# EAGLE board extruderControllerv1 (EAGLE 9.2.2)

Size 117.78 x 68.57 mm. Coordinates in mm from the lower left corner, seen from the top.
Outline: 0,0 117.78,0 117.78,68.57 0,68.57 0,0
Copper layers (1*16): Top 0.035mm / dielectric 1.5mm / Bottom 0.035mm
Design rules "default": minimum track width 6mil, minimum drill 0.35mm, track to track 6mil, track to pad 6mil, pad to pad 6mil, via to via 6mil, smd to smd 6mil, copper to edge 40mil, drill to drill 6mil, minimum pad ring 10mil, minimum via ring 8mil, stop-mask expansion 4mil, vias tented up to drill 0mil, thermal gap 10mil

## Footprints (pad centres in the part's own frame; a part is rotated, then mirrored left to right if it is on the bottom)
PANASONIC_D = smd 3 x 1.4: + 2.4,0; - -2.4,0
C0603 = smd 1.1 x 1: 1 -0.85,0; 2 0.85,0
SMB = smd 2.4 x 2.4: A 2.2,0; C -2.2,0
3,3-PAD = drill 3.3 pad 5.842: B3,3 0,0
SOT223 = smd 1.219 x 2.235: 1 -2.311,-3.099; 2 0,-3.099; 3 2.311,-3.099 | smd 3.6 x 2.2: TAB 0,3.099
SO08 = smd 0.66 x 2.032: 1 -1.905,-3.073; 2 -0.635,-3.073; 3 0.635,-3.073; 4 1.905,-3.073; 5 1.905,3.073; 6 0.635,3.073; 7 -0.635,3.073; 8 -1.905,3.073
SO16 = smd 0.66 x 2.032: 1 -4.445,-3.073; 2 -3.175,-3.073; 3 -1.905,-3.073; 4 -0.635,-3.073; 5 0.635,-3.073; 6 1.905,-3.073; 7 3.175,-3.073; 8 4.445,-3.073; 9 4.445,3.073; 10 3.175,3.073; 11 1.905,3.073; 12 0.635,3.073; 13 -0.635,3.073; 14 -1.905,3.073; 15 -3.175,3.073; 16 -4.445,3.073
QS = drill 0.61 long: 1 -2.54,0; 2 2.54,0
SOT669 = smd 0.7 x 1.4: 1 -1.905,-2.65; 2 -0.635,-2.65; 3 0.635,-2.65; 4 1.905,-2.65 | smd 5 x 4.3: MB 0,1
R0805 = smd 1.3 x 1.5: 1 -0.95,0; 2 0.95,0
R1210 = smd 1.6 x 2.7: 1 -1.4,0; 2 1.4,0
MA03-2 = drill 1.016: 1 -2.54,-1.27 | drill 1.016 octagon: 2 -2.54,1.27; 3 0,-1.27; 4 0,1.27; 5 2.54,-1.27; 6 2.54,1.27
TQFP100 = smd 1.5 x 0.3: 1 -8,6; 2 -8,5.5; 3 -8,5; 4 -8,4.5; 5 -8,4; 6 -8,3.5; 7 -8,3; 8 -8,2.5; 9 -8,2; 10 -8,1.5; 11 -8,1; 12 -8,0.5; 13 -8,0; 14 -8,-0.5; 15 -8,-1; 16 -8,-1.5; 17 -8,-2; 18 -8,-2.5; 19 -8,-3; 20 -8,-3.5; 21 -8,-4; 22 -8,-4.5; 23 -8,-5; 24 -8,-5.5; 25 -8,-6; 51 8,-6; 52 8,-5.5; 53 8,-5; 54 8,-4.5; 55 8,-4; 56 8,-3.5; 57 8,-3; 58 8,-2.5; 59 8,-2; 60 8,-1.5; 61 8,-1; 62 8,-0.5; 63 8,0; 64 8,0.5; 65 8,1; 66 8,1.5; 67 8,2; 68 8,2.5; 69 8,3; 70 8,3.5; 71 8,4; 72 8,4.5; 73 8,5; 74 8,5.5; 75 8,6 | smd 0.3 x 1.5: 26 -6,-8; 27 -5.5,-8; 28 -5,-8; 29 -4.5,-8; 30 -4,-8; 31 -3.5,-8; 32 -3,-8; 33 -2.5,-8; 34 -2,-8; 35 -1.5,-8; 36 -1,-8; 37 -0.5,-8; 38 0,-8; 39 0.5,-8; 40 1,-8; 41 1.5,-8; 42 2,-8; 43 2.5,-8; 44 3,-8; 45 3.5,-8; 46 4,-8; 47 4.5,-8; 48 5,-8; 49 5.5,-8; 50 6,-8; 76 6,8; 77 5.5,8; 78 5,8; 79 4.5,8; 80 4,8; 81 3.5,8; 82 3,8; 83 2.5,8; 84 2,8; 85 1.5,8; 86 1,8; 87 0.5,8; 88 0,8; 89 -0.5,8; 90 -1,8; 91 -1.5,8; 92 -2,8; 93 -2.5,8; 94 -3,8; 95 -3.5,8; 96 -4,8; 97 -4.5,8; 98 -5,8; 99 -5.5,8; 100 -6,8
SO08-MAX6675 = smd 0.6 x 2.2: 1 -1.905,-2.6; 2 -0.635,-2.6; 3 0.635,-2.6; 4 1.905,-2.6; 5 1.905,2.6; 6 0.635,2.6; 7 -0.635,2.6; 8 -1.905,2.6
22-23-2081 = drill 1 long: 1 -8.89,0; 2 -6.35,0; 3 -3.81,0; 4 -1.27,0; 5 1.27,0; 6 3.81,0; 7 6.35,0; 8 8.89,0
0446200002 = drill 0.889 pad 1.422: 1 3.556,2.54; 2 2.54,4.318; 3 1.524,2.54; 4 0.508,4.318; 5 -0.508,2.54; 6 -1.524,4.318; 7 -2.54,2.54; 8 -3.556,4.318 | drill 1.575 pad 2.286: S@1 -8.103,3.429; S@2 8.103,3.429 | hole 3.251: 6.35,0; -6.35,0
22-23-2021 = drill 1 long: 1 -1.27,0; 2 1.27,0
22-23-2051 = drill 1 long: 1 -5.08,0; 2 -2.54,0; 3 0,0; 4 2.54,0; 5 5.08,0
22-23-2041 = drill 1 long: 1 -3.81,0; 2 -1.27,0; 3 1.27,0; 4 3.81,0

## Placement (x,y rotation side)
C1  47uF  [PANASONIC_D]  25.4,63.5 270 top
C2  47uF  [PANASONIC_D]  44.45,63.5 270 top
C3  [C0603]  27.94,54.61 0 top
C4  [C0603]  33.02,54.61 180 top
C5  0.1uF  [C0603]  30.48,64.77 90 top
C6  0.1uF  [C0603]  40.64,58.42 90 top
C7  0.1uF  [C0603]  43.18,49.53 90 top
C8  0.1uF  [C0603]  21.59,15.24 270 top
C9  0.1uF  [C0603]  31.75,15.24 270 top
C10  0.1uF  [C0603]  41.91,15.24 270 top
C11  0.1uF  [C0603]  52.07,15.24 270 top
C12  0.1uF  [C0603]  95.25,38.1 0 top
D1  [SMB]  20.32,58.42 180 top
H1  MOUNT-PAD-ROUND3.3  [3,3-PAD]  5.08,63.5 0 top
H2  MOUNT-PAD-ROUND3.3  [3,3-PAD]  5.08,5.08 0 top
H3  MOUNT-PAD-ROUND3.3  [3,3-PAD]  113.03,5.08 0 top
H4  MOUNT-PAD-ROUND3.3  [3,3-PAD]  113.03,63.5 0 top
IC1  LM1117MPX-5.0  [SOT223]  35.56,60.96 180 top
IC2  MAX3467CPA  [SO08]  93.98,33.02 270 top
IC4  ULN2003AD  [SO16]  73.66,17.78 180 top
Q1  [QS]  30.48,50.8 180 top
Q2  PH7030L  [SOT669]  7.62,54.61 90 top
Q3  PH7030L  [SOT669]  7.62,45.72 90 top
Q4  PH7030L  [SOT669]  7.62,36.83 90 top
Q5  PH7030L  [SOT669]  7.62,27.94 90 top
Q6  PH7030L  [SOT669]  7.62,19.05 90 top
R1  [R0805]  40.64,48.26 270 top
R2  [R0805]  13.97,55.88 180 top
R3  [R0805]  13.97,53.34 180 top
R4  [R0805]  13.97,46.99 180 top
R5  [R0805]  13.97,44.45 180 top
R6  [R0805]  13.97,38.1 180 top
R7  [R0805]  13.97,35.56 180 top
R8  [R0805]  13.97,29.21 180 top
R9  [R0805]  13.97,26.67 180 top
R10  [R0805]  13.97,20.32 180 top
R11  [R0805]  13.97,17.78 180 top
R12  [R1210]  101.6,29.21 270 top
R13  [R1210]  101.6,35.56 90 top
SV1  [MA03-2]  60.96,55.88 180 top
U1  ATMEGA2560AU  [TQFP100]  49.53,38.1 270 top
U$1  MAX6675  [SO08-MAX6675]  26.67,17.78 0 top
U$2  MAX6675  [SO08-MAX6675]  36.83,17.78 0 top
U$3  MAX6675  [SO08-MAX6675]  46.99,17.78 0 top
U$4  MAX6675  [SO08-MAX6675]  57.15,17.78 0 top
X1  22-23-2081  [22-23-2081]  64.77,3.81 180 top
X2  22-23-2081  [22-23-2081]  39.37,3.81 180 top
X3  0446200002  [0446200002]  109.22,33.02 270 top
X4  22-23-2021  [22-23-2021]  15.24,64.77 0 top
X5  22-23-2051  [22-23-2051]  17.78,3.81 0 top
X6  22-23-2041  [22-23-2041]  85.09,3.81 0 top
X7  22-23-2041  [22-23-2041]  100.33,3.81 0 top

## Library data of the parts
C1-C12 = rcl; SPICEPREFIX: C
D1 = diode
H1-H4 = holes
IC1 = lm1117
IC2 = maxim; OC_FARNELL: unknown; OC_NEWARK: unknown
IC4 = uln-udn
Q1 = special
Q2-Q6 = transistor-power
R1-R13 = rcl; SPICEPREFIX: R
SV1 = con-lstb; OC_FARNELL: unknown; OC_NEWARK: unknown
U1 = SparkFun-IC-Microcontroller; PROD_ID: IC-10040
U$1-U$4 = SparkFun-AnalogIC
X1 X2 = con-molex; MF: MOLEX; MPN: 22-23-2081; OC_FARNELL: 1756826; OC_NEWARK: 01C7592
X3 = con-molex; MF: MOLEX; MPN: 0446200002; OC_FARNELL: 9251910
X4 = con-molex; MF: MOLEX; MPN: 22-23-2021; OC_FARNELL: 1462926; OC_NEWARK: 25C3832
X5 = con-molex; MF: MOLEX; MPN: 22-23-2051; OC_FARNELL: 1462952; OC_NEWARK: 38C9178
X6 X7 = con-molex; MF: MOLEX; MPN: 22-23-2041; OC_FARNELL: 1462920; OC_NEWARK: 38C0355

## Nets
+5V: C2.+ C6.1 C7.1 C8.1 C9.1 C10.1 C11.1 C12.1 IC1.2 IC1.TAB IC2.1 R1.1 SV1.5 U1.10 U1.31 U1.61 U1.80 U1.98 U1.99 U1.100 U$1.4 U$2.4 U$3.4 U$4.4 X1.2 X1.4 X1.6 X1.8 X6.3
+12V: D1.A X4.1
GND: C1.- C2.- C3.2 C4.2 C5.2 C6.2 C7.2 C8.2 C9.2 C10.2 C11.2 C12.2 IC1.1 IC2.4 IC4.8 SV1.1 U1.11 U1.32 U1.62 U1.81 U$1.1 U$2.1 U$3.1 U$4.1 X3.2 X3.4 X3.6 X3.8 X4.2 X6.4
N$2: Q2.4 R2.2
N$3: IC4.10 X1.7
N$4: U$1.2 X2.8
N$5: U$1.3 X2.7
N$6: U$2.2 X2.6
N$7: U$2.3 X2.5
N$8: U$3.2 X2.4
N$9: U$3.3 X2.3
N$10: U$4.2 X2.2
N$11: U$4.3 X2.1
N$12: IC4.11 X1.5
N$13: IC4.12 X1.3
N$14: IC4.13 X1.1
N$15: Q2.1 Q3.1 Q4.1 Q5.1 Q6.1 R3.2 R5.2 R7.2 R9.2 R11.2
N$18: C1.+ C5.1 D1.C IC1.3
N$19: C3.1 Q1.2 U1.33
N$20: C4.1 Q1.1 U1.34
N$21: IC4.14 X6.1
N$22: Q2.MB X5.5
N$23: Q3.4 R4.2
N$24: IC4.15 X6.2
N$25: Q3.MB X5.4
N$26: Q4.4 R6.2
N$27: IC2.7 R13.1 X3.5
N$28: Q4.MB X5.3
N$29: Q5.4 R8.2
N$31: Q5.MB X5.2
N$32: Q6.4 R10.2
N$33: IC2.6 R12.1 X3.3
N$34: Q6.MB X5.1
N$35: IC2.5 R12.2 X3.1
N$36: IC2.8 R13.2 X3.7
N$37: IC4.2
PA0: IC4.4 U1.78
PA1: IC4.5 U1.77
PA2: IC4.6 U1.76
PA3: IC4.7 U1.75
PB1(SCK): SV1.4 U1.20 U$1.5 U$2.5 U$3.5 U$4.5
PB2(MOSI): SV1.3 U1.21
PB3(MISO): SV1.6 U1.22 U$1.7 U$2.7 U$3.7 U$4.7
PC0: U1.53 U$1.6
PC1: U1.54 U$2.6
PC2: U1.55 U$3.6
PC3: U1.56 U$4.6
PH0: IC2.2 U1.12
PH1: IC2.3 U1.13
PJ7: IC4.3 U1.79
PL0: R2.1 R3.1 U1.35
PL1: R4.1 R5.1 U1.36
PL2: R6.1 R7.1 U1.37
PL6: R8.1 R9.1 U1.41
PL7: R10.1 R11.1 U1.42
RESET: R1.2 SV1.2 U1.30

## Tracks (layer width: path | path; a pad name or v marks a point on that pad's centre or on a via)
+5V  (28 unrouted)
+12V  (1 unrouted)
GND  (29 unrouted)
N$2  (1 unrouted)
N$3  (1 unrouted)
N$4  (1 unrouted)
N$5  (1 unrouted)
N$6  (1 unrouted)
N$7  (1 unrouted)
N$8  (1 unrouted)
N$9  (1 unrouted)
N$10  (1 unrouted)
N$11  (1 unrouted)
N$12  (1 unrouted)
N$13  (1 unrouted)
N$14  (1 unrouted)
N$15  (9 unrouted)
N$18  (3 unrouted)
N$19  (2 unrouted)
N$20  (2 unrouted)
N$21  (1 unrouted)
N$22  (1 unrouted)
N$23  (1 unrouted)
N$24  (1 unrouted)
N$25  (1 unrouted)
N$26  (1 unrouted)
N$27  (2 unrouted)
N$28  (1 unrouted)
N$29  (1 unrouted)
N$31  (1 unrouted)
N$32  (1 unrouted)
N$33  (2 unrouted)
N$34  (1 unrouted)
N$35  (2 unrouted)
N$36  (2 unrouted)
PA0  (1 unrouted)
PA1  (1 unrouted)
PA2  (1 unrouted)
PA3  (1 unrouted)
PB1(SCK)  (5 unrouted)
PB2(MOSI)  (1 unrouted)
PB3(MISO)  (5 unrouted)
PC0  (1 unrouted)
PC1  (1 unrouted)
PC2  (1 unrouted)
PC3  (1 unrouted)
PH0  (1 unrouted)
PH1  (1 unrouted)
PJ7  (1 unrouted)
PL0  (2 unrouted)
PL1  (2 unrouted)
PL2  (2 unrouted)
PL6  (2 unrouted)
PL7  (2 unrouted)
RESET  (2 unrouted)

## Text on the board
tNames: Heaters | Motor | Fans | Thermocouples | F1- | F2- | F3- | F4- | F5- | T1+ | T1- | T2+ | T2- | T3+ | T3- | T4+ | T4- | 5V | SSR1 | 5V | SSR2 | 5V | SSR3 | 5V | SSR4 | DIR | STEP | 5V | GND | 5V | GND | Screw RPM